# Altium PCB Stepper PCB Correctionsv1.PcbDoc
Units mm, origin at the board's own origin, x right, y up, seen from the top; angles counter-clockwise.
Board outline 195.58 x 105.66 mm, 2 copper layers (Top Layer, Bottom Layer); 57 components, 50 nets, 280 pads, 5 vias.
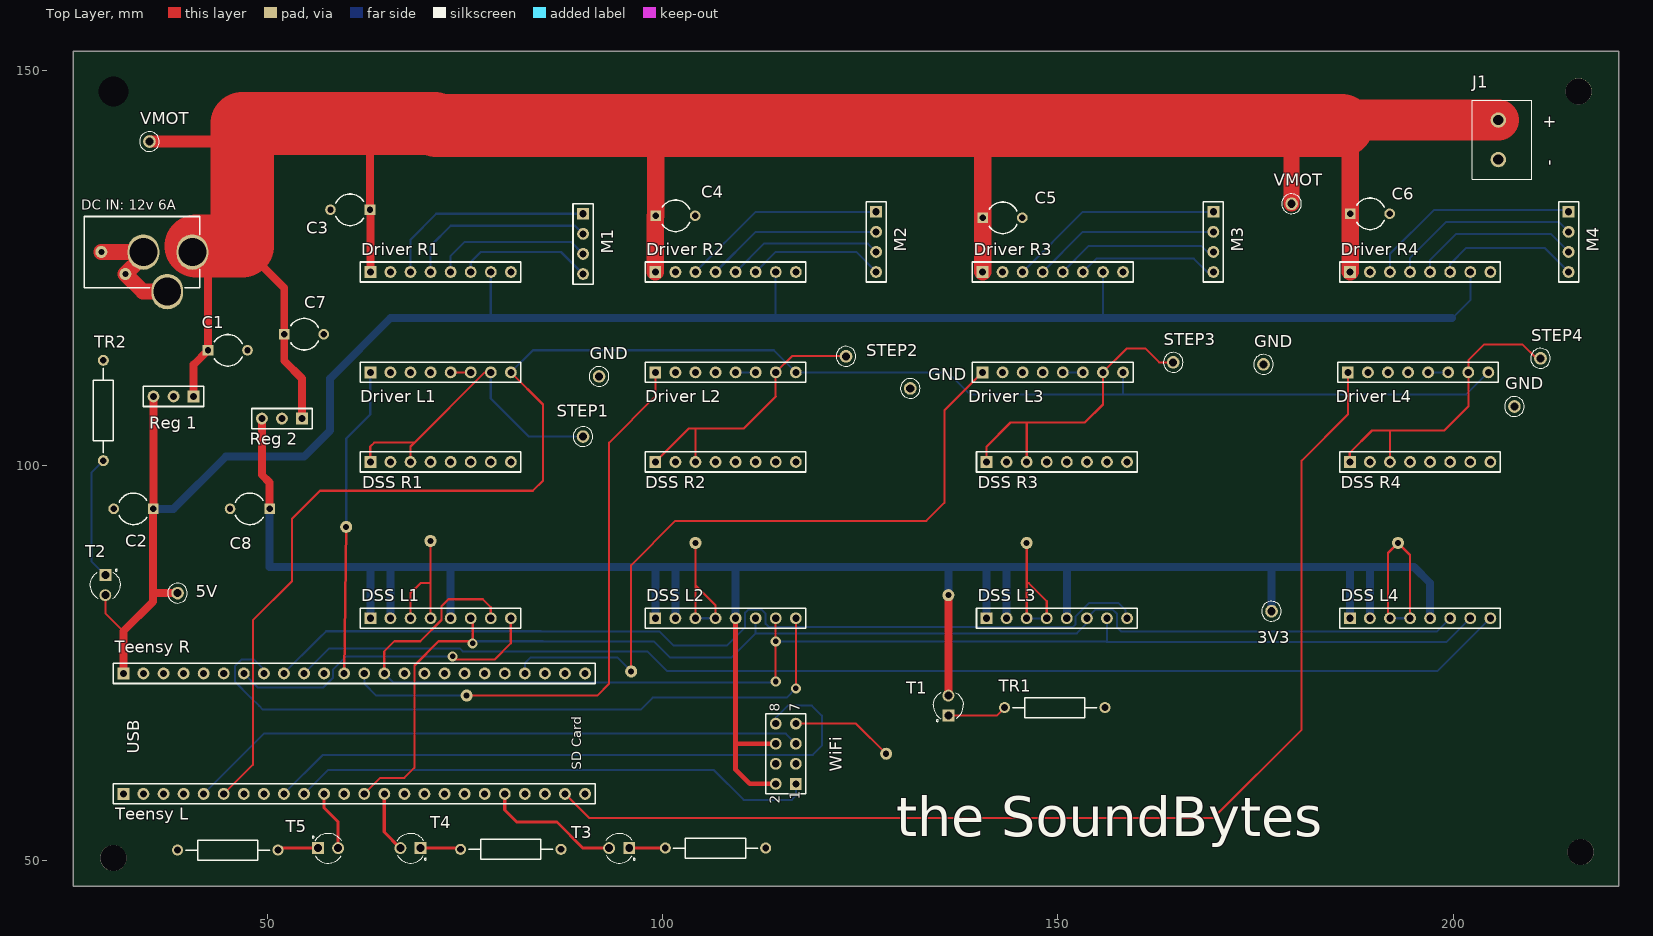
[diagram p0: Top Layer view]
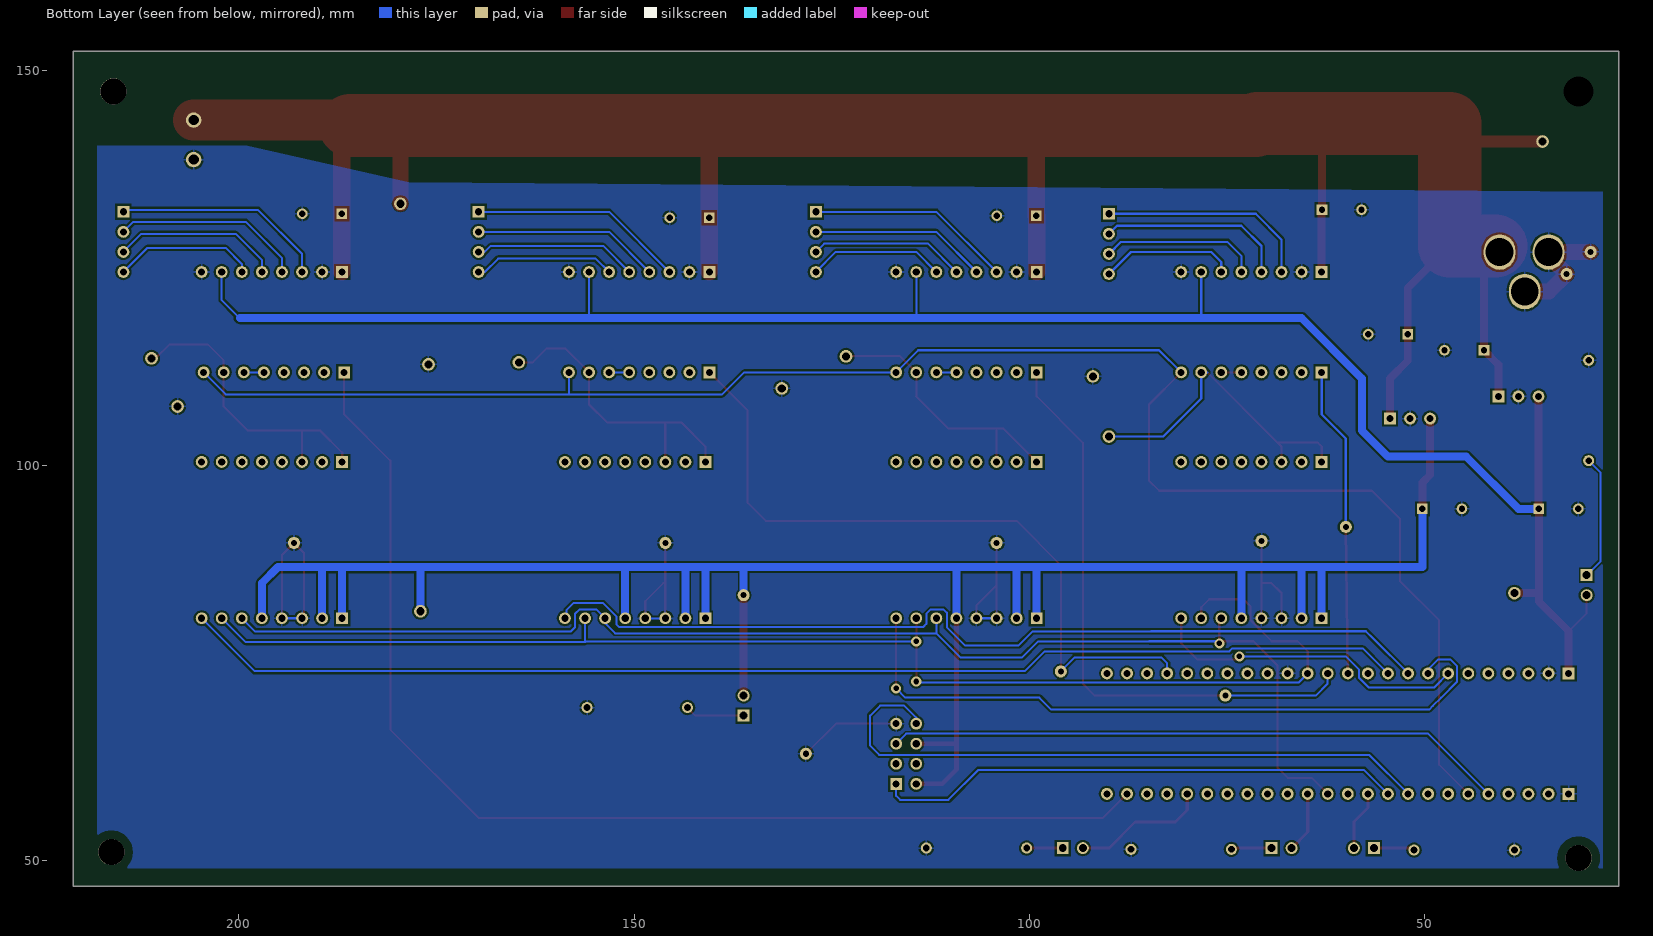
[diagram p1: Bottom Layer view, seen from below]

## Layer stack, top to bottom
Top Solder: solder mask 0.0102, Solder Resist, Dk 3.5
Top Layer: signal copper 0.0356
Dielectric 1: dielectric 0.32, FR-4, Dk 4.8
Bottom Layer: signal copper 0.0356
Bottom Solder: solder mask 0.0102, Solder Resist, Dk 3.5

## Board outline
25.4,46.736 220.98,46.736 220.98,152.4 25.4,152.4

## Design rules (kind name [scope] priority, off if disabled: settings)
Clearance [All] p1: gap=0.254
PolygonConnect [All] p1: connectstyle=Relief reliefconductorwidth=0.254 reliefentries=4 polygonreliefangle="90 Angle" airgapwidth=0.254
RoutingVias [All] p1: holewidth=0.711 width=1.27 viastyle="Through Hole" minholewidth=0.711 minwidth=1.27 maxholewidth=0.711 maxwidth=1.27
SolderMaskExpansion [All] p1: expansion=0.102
Width Width_1 [All] p1: maxlimit=1 minlimit=0.28 preferedwidth=1 minimp=50.000000 maximp=50.000000 favimp=50.000000
Width [InNet('VMOT')] p2: maxlimit=8.2 minlimit=7.6 preferedwidth=8 minimp=50.000000 maximp=50.000000 favimp=50.000000
30 further rules are at their usual default settings.

## Classes and differential pairs
component class "Stepper Teensy Breakout": 3V3 5V C1 C2 C3 C4 C5 C6 C7 C8 "DC IN: 12v 6A" "Driver L1" "Driver L2" "Driver L3" "Driver L4" "Driver R1" "Driver R2" "Driver R3" "Driver R4" "DSS L1" "DSS L2" "DSS L3" "DSS L4" "DSS R1" "DSS R2" "DSS R3" "DSS R4" GND J1 M1 M2 M3 M4 "Reg 1" "Reg 2" STEP1 STEP2 STEP3 STEP4 T1 T2 T3 T4 T5 "Teensy L" "Teensy R" TR1 TR2 VMOT WiFi

## Components (designator, comment, footprint, x,y, rotation, side; value= is the part's Value field where it differs from the comment)
3V3 "" TPCW51D250H460P 177.038,81.534 r0 top (schematic designator TP11)
5V "" TPCW51D250H460P 38.608,83.82 r90 top (schematic designator TP10)
C1 "Cap2" CAPR5-4X5 44.958,114.554 r0 top
C2 "Cap2" CAPR5-4X5 33.02,94.488 r180 top
C3 "" CAPR5-4X5 60.452,132.334 r180 top
C4 "Cap2" CAPR5-4X5 101.6,131.572 r0 top
C5 "Cap2" CAPR5-4X5 143.002,131.318 r0 top
C6 "Cap2" CAPR5-4X5 189.484,131.826 r0 top
C7 "Cap2" CAPR5-4X5 54.61,116.586 r0 top
C8 "Cap2" CAPR5-4X5 47.752,94.488 r180 top
"DC IN: 12v 6A" "PWR2.5" KLD-0202 26.79,126.984 r0 top (schematic designator "PWR Jack")
"Driver L1" "Header 8" HDR1X8 63,111.76 r0 top
"Driver L2" "Header 8" HDR1X8 99.06,111.76 r0 top locked
"Driver L3" "Header 8" HDR1X8 140.462,111.76 r0 top locked
"Driver L4" "Header 8" HDR1X8 186.69,111.76 r0 top locked
"Driver R1" "Header 8" HDR1X8 63,124.46 r0 top
"Driver R2" "Header 8" HDR1X8 99.06,124.46 r0 top locked
"Driver R3" "Header 8" HDR1X8 140.462,124.46 r0 top locked
"Driver R4" "Header 8" HDR1X8 186.944,124.46 r0 top locked
"DSS L1" "Header 8" HDR1X8 63,80.645 r0 top locked
"DSS L2" "Header 8" HDR1X8 99.06,80.645 r0 top
"DSS L3" "Header 8" HDR1X8 140.97,80.645 r0 top locked
"DSS L4" "Header 8" HDR1X8 186.944,80.645 r0 top
"DSS R1" "Header 8" HDR1X8 63,100.42 r0 top locked
"DSS R2" "Header 8" HDR1X8 99.06,100.42 r0 top
"DSS R3" "Header 8" HDR1X8 140.97,100.42 r0 top
"DSS R4" "Header 8" HDR1X8 186.944,100.42 r0 top
GND "" TPCW51D250H460P 207.772,107.442 r0 top (schematic designator TP8)
GND "" TPCW51D250H460P 91.948,111.252 r0 top (schematic designator TP7)
GND "" TPCW51D250H460P 176.022,112.776 r0 top (schematic designator TP6)
GND "" TPCW51D250H460P 131.318,109.728 r0 top (schematic designator TP5)
J1 "" 691102710002 205.74,141.184 r270 top
M1 "Header 4" HDR1X4 89.916,131.826 r270 top (schematic designator "Motor 1")
M2 "Header 4" HDR1X4 127,132.08 r270 top (schematic designator "Motor 2")
M3 "Header 4" HDR1X4 169.672,132.08 r270 top (schematic designator "Motor 3")
M4 "Header 4" HDR1X4 214.63,132.08 r270 top (schematic designator "Motor 4")
"Reg 1" "Header 3" HDR1X3 40.64,108.712 r180 top (schematic designator "Sw Reg")
"Reg 2" "Header 2" HDR1X3 54.356,105.918 r180 top (schematic designator "Sw Reg1")
STEP1 "" TPCW51D250H460P 89.916,103.632 r0 top (schematic designator TP1)
STEP2 "" TPCW51D250H460P 123.19,113.792 r0 top (schematic designator TP2)
STEP3 "" TPCW51D250H460P 164.592,113.03 r0 top (schematic designator TP3)
STEP4 "" TPCW51D250H460P 211.074,113.538 r0 top (schematic designator TP4)
T1 "LTL-1CHYE" LED_LTL-1CHYE_LTL-1CHYE(Primary) 136.144,69.596 r90 top
T2 "LTL-1CHYE" LED_LTL-1CHYE_LTL-1CHYE(Primary) 29.464,84.836 r270 top
T3 "LTL-1CHYE" LED_LTL-1CHYE_LTL-1CHYE(Primary) 94.488,51.562 r180 top
T4 "LTL-1CHYE" LED_LTL-1CHYE_LTL-1CHYE(Primary) 68.072,51.562 r180 top
T5 "LTL-1CHYE" LED_LTL-1CHYE_LTL-1CHYE(Primary) 57.658,51.562 r0 top
"Teensy L" "Header 24" HDR1X24 31.75,58.42 r0 top locked
"Teensy R" "Header 24" HDR1X24 31.75,73.66 r0 top locked
TR1 "" AXIAL-0.5 149.606,69.342 r180 top
TR2 "" AXIAL-0.5 29.21,106.934 r270 top
TR3 "" AXIAL-0.5 106.68,51.562 r180 top
TR4 "" AXIAL-0.5 80.772,51.402 r180 top
TR5 "" AXIAL-0.5 44.958,51.308 r180 top
VMOT "" TPCW51D250H460P 179.578,133.096 r180 top (schematic designator TP12)
VMOT "" TPCW51D250H460P 35.052,140.97 r0 top (schematic designator TP9)
WiFi "Header 4X2" HDR2X4 116.84,59.69 r90 top (schematic designator ESP)

## Footprints (in the part's own frame and the unit in brackets; to place one, negate y for a bottom-side part, rotate by r counter-clockwise, add the part's x,y. Pads: shape width x height; smd on the part's side, far side on the other; paste and mask are expansions set on the pad)
691102710002 [mm]
  round 1.95 hole 1.3: 1(-2.5,0) 2(2.5,0)
  silkscreen extent -5,-3.3 5,4.2
AXIAL-0.5 [mm] "Axial Device, Thru-Hole; 2 Leads; 0.5 in Pin Spacing"
  round 1.4 hole 0.85: 1(-6.35,0) 2(6.35,0)
  silkscreen extent -5.33,-1.27 5.33,1.27
CAPR5-4X5 [mm] "Capacitor; 2 Leads"
  rect 1.35x1.35 hole 0.8: 1(-2.5,0)
  round 1.35 hole 0.8: 2(2.5,0)
  silkscreen extent -1.69,-2 1.82,2
HDR1X3 [mm] "Connector; Header; 3 Position"
  rect 1.5x1.5 hole 0.9: 1(0,0)
  round 1.5 hole 0.9: 2(2.54,0) 3(5.08,0)
  silkscreen extent -1.27,-1.27 6.35,1.27
HDR1X4 [mm] "Connector; Header; 4 Position"
  rect 1.5x1.5 hole 0.9: 1(0,0)
  round 1.5 hole 0.9: 2(2.54,0) 3(5.08,0) 4(7.62,0)
  silkscreen extent -1.27,-1.27 8.89,1.27
HDR1X8 [mm] "Connector; Header; 8 Position"
  rect 1.5x1.5 hole 0.9: 1(0,0)
  round 1.5 hole 0.9: 2(2.54,0) 3(5.08,0) 4(7.62,0) 5(10.16,0) 6(12.7,0) 7(15.24,0) 8(17.78,0)
  silkscreen extent -1.27,-1.27 19.05,1.27
HDR1X24 [mm] "Connector; Header; 24 Position"
  rect 1.5x1.5 hole 0.9: 1(0,0)
  round 1.5 hole 0.9: 2(2.54,0) 3(5.08,0) 4(7.62,0) 5(10.16,0) 6(12.7,0) 7(15.24,0) 8(17.78,0) 9(20.32,0) 10(22.86,0) 11(25.4,0) 12(27.94,0) 13(30.48,0) 14(33.02,0) 15(35.56,0) 16(38.1,0) 17(40.64,0) 18(43.18,0) 19(45.72,0) 20(48.26,0) 21(50.8,0) 22(53.34,0) 23(55.88,0) 24(58.42,0)
  silkscreen extent -1.27,-1.27 59.69,1.27
HDR2X4 [mm] "Connector; Header; 4x2 Position"
  rect 1.5x1.5 hole 0.9: 1(0,0)
  round 1.5 hole 0.9: 2(0,2.54) 3(2.54,0) 4(2.54,2.54) 5(5.08,0) 6(5.08,2.54) 7(7.62,0) 8(7.62,2.54)
  silkscreen extent -1.27,-1.27 8.89,3.81
KLD-0202 [mm] "DC Power Jack, 2.5mm, KLD Series, PCB Mount"
  oval 4x4.5 hole 3.5: 1(13.7,0) 2(7.5,0) 3(10.5,-5)
  round 1.5 hole 0.2: 1A(13.7,-1.25) 1B(13.7,1.25) 2A(7.5,-1) 2B(7.5,1) 3A(9.5,-5) 3B(11.5,-5)
  silkscreen extent 0,-4.5 14.6,4.5
LED_LTL-1CHYE_LTL-1CHYE(Primary) [mm]
  round 1.508 hole 1: A(1.27,0)
  rect 1.508x1.508 hole 1: C(-1.27,0)
  silkscreen extent -2.03,-1.9 1.66,1.9
TPCW51D250H460P [mm]
  round 1.6 hole 1.02: 1(0,0)
  silkscreen extent -1.25,-1.25 1.25,1.25

## Part data
3V3 5V GND GND GND GND STEP1 STEP2 STEP3 STEP4 VMOT VMOT: library part 5003, "Test Point; Orange; Thru-Hole; Snap-Fit; SilverPlate; 0.040 in. Dia.; 0.300 In."
C1 C2 C4 C5 C6 C7 C8: "Capacitor"
C3: library part Cap2, "Capacitor"
"DC IN: 12v 6A": "Low Voltage Power Supply Connector"
"Driver L1" "Driver L2" "Driver L3" "Driver L4" "Driver R1" "Driver R2" "Driver R3" "Driver R4" "DSS L1" "DSS L2" "DSS L3" "DSS L4" "DSS R1" "DSS R2" "DSS R3" "DSS R4": "Header, 8-Pin"
J1: library part 691102710002, "102 Series 5mm Pitch Straight, PCB Terminal Block, Through Hole, 2 Way"
M1 M2 M3 M4: "Header, 4-Pin"
"Reg 1": "Header, 3-Pin"
"Reg 2": library part "Header 3", "Header, 3-Pin"
T1 T2 T3 T4 T5: "Yellow 3.1 mm 45° Tinted Clear 40 mcd 2.1 V LED Through Hole"
"Teensy L" "Teensy R": "Header, 24-Pin"
TR1 TR2 TR3 TR4 TR5: library part "Res Semi", "Semiconductor Resistor"
WiFi: "Header, 4-Pin, Dual row"

## Free pads (board coordinates)
  round 3.3 hole 3.8: 0(30.48,147.32)
  round 1.524 hole 0.762: 2(28.956,127) 3(32.004,124.206) 9(75.184,70.866) 10(96.012,73.914) 11(136.144,83.566) 15(70.612,90.424) 16(104.14,90.17) 17(146.05,90.17) 18(193.04,90.17) 19(128.27,63.5) 20(59.944,92.202)
  round 3.3 hole 3.3: 6(215.9,147.32) 7(216.154,51.054) 8(30.48,50.292)

## Via types
v1: diameter 1.27, hole 0.711, Top Layer to Bottom Layer, 5 vias

## Nets (pads, with @x,y where several pads share a name; then routed paths per layer and width w, separated by ;. In a path a pad name is that pad's centre, name@x,y a point inside that pad or via, vN(x,y) a via of type N, cw(c..) or ccw(c..) an arc to the next point about the centre after c; other vN are vias at no path point)
1A_A: "Driver R1.5" M1.3 | length 20.2
  Bottom Layer w0.28: 73.16,124.46 73.16,126.5 74.93,128.27 88.392,128.27 M1.3
1A_B: "Driver R2.5" M2.3 | length 19.7
  Bottom Layer w0.254: 109.22,124.46 112.801,128.041 125.959,128.041 M2.3
1A_C: "Driver R3.5" M3.3 | length 20.7
  Bottom Layer w0.254: 150.622,124.46 153.924,127.762 168.148,127.762 168.91,127 M3.3
1A_D: "Driver R4.5" M4.3 | length 21.4
  Bottom Layer w0.254: 197.104,124.46 197.104,125.984 200.406,129.286 212.344,129.286 M4.3
1B_A: "Driver R1.6" M1.4 | length 17.2
  Bottom Layer w0.28: 75.7,124.46 75.7,125.738 76.962,127 87.122,127 M1.4
1B_B: "Driver R2.6" M2.4 | length 17.3
  Bottom Layer w0.254: 111.76,124.46 114.3,127 124.46,127 M2.4
1B_C: "Driver R3.6" M3.4 | length 17.9
  Bottom Layer w0.254: 153.162,124.46 154.864,126.162 167.208,126.162 168.91,124.46 M3.4
1B_D: "Driver R4.6" M4.4 | length 18.1
  Bottom Layer w0.254: 199.644,124.46 199.644,125.476 201.676,127.508 211.582,127.508 M4.4
2A_A: "Driver R1.4" M1.2 | length 24.1
  Bottom Layer w0.28: 70.62,124.46 70.62,127.745 73.177,130.302 88.9,130.302 M1.2
2A_B: "Driver R2.4" M2.2 | length 22.4
  Bottom Layer w0.254: 106.68,124.46 111.76,129.54 M2.2
2A_C: "Driver R3.4" M3.2 | length 23.7
  Bottom Layer w0.254: 148.082,124.46 153.162,129.54 M3.2
2A_D: "Driver R4.4" M4.2 | length 24.3
  Bottom Layer w0.254: 194.564,124.46 194.564,126.238 199.136,130.81 213.36,130.81 M4.2
2B_A: "Driver R1.3" M1.1 | length 27.3
  Bottom Layer w0.28: 68.08,124.46 68.08,128.557 71.349,131.826 M1.1
2B_B: "Driver R2.3" M2.1 | length 26
  Bottom Layer w0.254: 104.14,124.46 111.76,132.08 M2.1
2B_C: "Driver R3.3" M3.1 | length 27.3
  Bottom Layer w0.254: 145.542,124.46 153.162,132.08 M3.1
2B_D: "Driver R4.3" M4.1 | length 27.3
  Bottom Layer w0.254: 192.024,124.46 192.024,126.746 197.612,132.334 214.376,132.334 M4.1
3V3: 3V3.1 "DSS L1.1" "DSS L1.2" "DSS L1.5" "DSS L2.1" "DSS L2.2" "DSS L2.5" "DSS L3.1" "DSS L3.2" "DSS L3.5" "DSS L4.1" "DSS L4.2" "DSS L4.5" "Reg 2.3" C8.1 pad.11 T1.A WiFi.2 WiFi.6 | length 294.5
  Top Layer w0.6: 109.22,80.645 109.22,64.77 ; WiFi.2 110.998,59.69 109.22,61.468 109.22,64.77 ; WiFi.6 109.22,64.77
  Top Layer w1: 49.276,105.918 49.276,98.806 50.252,97.83 C8.1 ; T1.A pad.11
  Bottom Layer w1: C8.1 50.252,87.122 63,87.122 ; 63,80.645 63,87.122 ; 65.54,80.645 65.54,87.114 65.532,87.122 ; 73.16,80.645 73.16,87.114 73.152,87.122 ; 99.06,80.645 99.06,87.122 ; 101.6,80.645 101.6,87.122 ; 109.22,80.645 109.22,87.122 ; pad.11 136.144,87.122 ; 140.97,80.645 140.97,87.122 ; 143.51,80.645 143.51,87.122 ; 151.13,80.645 151.13,87.122 ; 3V3.1 177.038,87.122 ; 186.944,80.645 186.944,87.122 ; 189.484,80.645 189.484,87.122 ; 197.104,80.645 197.104,85.09 195.072,87.122 189.484,87.122 ; 63,87.122 65.532,87.122 ; 65.532,87.122 73.152,87.122 ; 73.152,87.122 99.06,87.122 ; 99.06,87.122 101.6,87.122 ; 101.6,87.122 109.22,87.122 ; 109.22,87.122 136.144,87.122 ; 136.144,87.122 140.97,87.122 ; 140.97,87.122 143.51,87.122 ; 143.51,87.122 151.13,87.122 ; 151.13,87.122 177.038,87.122 ; 177.038,87.122 186.944,87.122 ; 186.944,87.122 189.484,87.122
5V: 5V.1 "Driver R1.7" "Driver R2.7" "Driver R3.7" "Driver R4.7" "Reg 1.3" "Teensy R.1" C2.1 T2.A | length 247.8
  Top Layer w0.254: T2.A 29.464,81.28 31.75,78.994
  Top Layer w0.28: C2.1 C2.1@35.56,94.528
  Top Layer w1: 31.75,73.66 31.75,78.994 35.52,82.764 35.52,83.82 ; C2.1 35.52,83.82 ; C2.1@35.56,94.528 35.56,108.712 ; 5V.1 35.52,83.82
  Bottom Layer w0.254: 114.3,118.618 114.3,124.46 ; 155.702,118.618 155.702,124.46 ; 199.898,118.618 202.184,120.904 202.184,124.46
  Bottom Layer w0.28: 78.232,118.618 78.24,118.626 78.24,124.46
  Bottom Layer w1: C2.1 38.1,94.488 44.704,101.092 54.61,101.092 57.912,104.394 57.912,110.998 65.532,118.618 78.232,118.618 114.3,118.618 155.702,118.618 199.898,118.618
24: "Teensy L.14" T4.A | length 7.7
  Top Layer w0.4: 64.77,58.42 64.77,53.594 T4.A
28: "Teensy L.20" T3.A | length 17.2
  Top Layer w0.4: 80.01,58.42 80.01,56.388 81.534,54.864 86.614,54.864 89.916,51.562 T3.A
CS1: "DSS L1.8" "Teensy R.7" | length 40.9
  Top Layer w0.28: v1(73.406,75.819) 73.787,75.438 78.74,75.438 80.78,77.478 80.78,80.645
  Bottom Layer w0.254: 46.99,73.66 48.768,71.882 57.023,71.882 58.293,73.152 58.293,74.168 59.944,75.819 v1(73.406,75.819)
CS2: "DSS L2.8" "Teensy R.8" | length 89.4
  Top Layer w0.254: v1(116.84,71.78) 116.84,80.645
  Bottom Layer w0.254: 49.53,73.66 49.53,74.168 48.26,75.438 46.736,75.438 45.847,74.549 45.847,72.644 47.879,70.612 48.938,69.553 49.403,69.088 97.199,69.088 98.723,70.612 115.672,70.612 v1(116.84,71.78)
CS3: "DSS L3.8" "Teensy R.9" | length 117.4
  Bottom Layer w0.254: 52.07,73.66 56.49,78.08 ; 84.582,78.994 99.568,78.994 101.346,77.216 108.153,77.216 110.439,79.502 110.439,81.356 110.859,81.776 112.458,81.776 113.03,81.204 113.03,79.934 113.45,79.514 151.892,79.514 152.261,79.883 152.261,80.887 153.924,82.55 157.702,82.55 158.535,81.717 158.535,80.86 158.75,80.645
  Bottom Layer w0.28: 56.49,78.08 57.404,78.994 84.582,78.994
CS4: "DSS L4.8" "Teensy R.10" | length 155.4
  Bottom Layer w0.254: 54.61,73.66 57.785,76.835 74.295,76.835 74.676,76.454 98.044,76.454 100.559,73.939 198.018,73.939 204.724,80.645
DIR: "Driver L1.8" "Driver L2.8" "Driver L3.8" "Driver L4.8" "Teensy L.6" | length 218.6
  Top Layer w0.254: 44.45,58.42 48.133,62.103 48.133,80.391 53.086,85.344
  Top Layer w0.28: 53.086,85.344 53.086,93.218 56.642,96.774 83.566,96.774 84.836,98.044 84.836,107.704 80.78,111.76
  Bottom Layer w0.254: 114.046,114.554 116.84,111.76 136.068,111.76 138.862,108.966 158.242,108.966 ; 158.242,111.76 158.242,108.966 ; 204.47,111.76 201.676,108.966 158.242,108.966
  Bottom Layer w0.28: 80.78,111.76 83.574,114.554 114.046,114.554
ENA1: "Driver L1.1" "Teensy R.12" pad.20 | length 39.4
  Top Layer w0.28: 59.69,73.66 pad.20
  Bottom Layer w0.28: pad.20 59.944,103.378 63,106.434 63,111.76
ENA2: "Driver L2.1" "Teensy R.13" pad.9 | length 75.3
  Top Layer w0.254: pad.9 91.694,70.866 93.218,72.39 93.218,102.87 99.06,108.712 99.06,111.76
  Bottom Layer w0.254: 62.23,73.66 62.23,72.39 63.754,70.866 pad.9
ENA3: "Driver L3.1" "Teensy R.21" pad.10 | length 90.6
  Top Layer w0.254: pad.10 96.012,87.376 101.6,92.964 133.35,92.964 135.636,95.25 135.636,106.934 140.462,111.76
  Bottom Layer w0.254: 82.55,73.66 82.55,74.93 83.312,75.692 94.234,75.692 pad.10
ENA4: "Driver L4.1" "Teensy L.23" | length 146.7
  Top Layer w0.254: 87.63,58.42 90.678,55.372 169.672,55.372 180.848,66.548 180.848,100.584 186.69,106.426 186.69,111.76
GND: "DC IN: 12v 6A.2" "DC IN: 12v 6A.2A" "DC IN: 12v 6A.2B" "DC IN: 12v 6A.3" "DC IN: 12v 6A.3A" "DC IN: 12v 6A.3B" "Driver R1.2" "Driver R1.8" "Driver R2.2" "Driver R2.8" "Driver R3.2" "Driver R3.8" "Driver R4.2" "Driver R4.8" "DSS L1.3" "DSS L1.4" "DSS L2.3" "DSS L2.4" "DSS L3.3" "DSS L3.4" "DSS L4.3" "DSS L4.4" "Reg 1.2" "Reg 2.2" "Teensy L.1" "Teensy R.2" "Teensy R.15" C1.2 C2.2 C3.2 C4.2 C5.2 C6.2 C7.2 C8.2 GND.1 J1.2 pad.2 pad.3 pad.15 pad.16 pad.17 pad.18 pad.19 TR1.1 TR2.1 TR3.1 TR4.1 TR5.2 WiFi.7 | length 102.9
  Top Layer w0.28: 68.08,80.645 68.08,83.828 69.342,85.09 70.612,85.09 ; pad.15 70.612,85.09 ; 70.62,80.645 70.612,80.653 70.612,85.09 ; 104.14,80.518 104.14,80.645 104.14,84.836 ; pad.16 104.14,84.836 ; 106.68,80.645 106.68,82.296 104.14,84.836 ; WiFi.7 124.46,67.31 pad.19 ; 146.05,80.645 146.05,85.09 ; pad.17 146.05,85.09 ; 148.59,80.645 148.59,82.804 146.304,85.09 146.05,85.09 ; 192.024,80.645 191.77,80.899 191.77,88.9 pad.18 194.564,88.646 194.564,80.645
  Top Layer w2: pad.2 33.274,127 33.29,126.984 ; 34.29,125.984 34.036,126.238 ; 34.29,127.984 34.29,126.984 34.29,126.492 34.036,126.238 ; 37.29,121.984 36.29,121.984 34.226,121.984 pad.3 34.036,126.238
  Bottom Layer w0.254: 146.05,80.645 148.59,80.645 ; 189.484,124.46 189.484,124.714
  Bottom Layer w0.28: 104.14,80.645 106.68,80.645 ; 192.024,80.645 194.564,80.645
NetT1_C: T1.C TR1.2 | length 7.5
  Top Layer w0.254: T1.C 142.24,68.326 TR1.2
NetT2_C: T2.C TR2.2 | length 15.8
  Bottom Layer w0.254: TR2.2 27.686,99.06 27.686,87.884 T2.C
NetT3_C: T3.C TR3.2 | length 4.6
  Top Layer w0.4: T3.C TR3.2
NetT4_C: T4.C TR4.2 | length 5.1
  Top Layer w0.4: T4.C 74.262,51.562 TR4.2
NetT5_A: "Teensy L.11" T5.A | length 7.6
  Top Layer w0.4: 57.15,58.42 57.15,56.642 58.928,54.864 T5.A
NetT5_C: T5.C TR5.1 | length 5.2
  Top Layer w0.4: TR5.1 51.562,51.562 T5.C
PIN3: "Teensy L.5" WiFi.5 | length 78.6
  Bottom Layer w0.254: 41.91,58.42 49.53,66.04 115.57,66.04 WiFi.5
PIN7: "Teensy L.9" WiFi.8 | length 82.2
  Bottom Layer w0.254: 52.07,58.42 57.011,63.361 118.987,63.361 120.142,64.516 120.142,68.326 118.872,69.596 115.824,69.596 114.3,68.072 WiFi.8
PIN8: "Teensy L.10" WiFi.1 | length 66.8
  Bottom Layer w0.254: 54.61,58.42 57.658,61.468 106.426,61.468 110.236,57.658 116.332,57.658 116.84,58.166 WiFi.1
RESET1: "Driver L1.5" "Driver L1.6" | length 2.5
  Top Layer w0.28: 73.16,111.76 75.7,111.76
RESET2: "Driver L2.5" "Driver L2.6" | length 2.5
  Bottom Layer w0.254: 109.22,111.76 111.76,111.76
RESET3: "Driver L3.5" "Driver L3.6" | length 2.5
  Bottom Layer w0.254: 150.622,111.76 153.162,111.76
RESET4: "Driver L4.5" "Driver L4.6" | length 2.5
  Bottom Layer w0.254: 196.85,111.76 199.39,111.76
SCK: "DSS L1.7" "DSS L2.7" "DSS L3.7" "DSS L4.7" "Teensy R.14" | length 172.4
  Top Layer w0.254: v1(114.3,72.644) v1(114.3,77.724) 114.3,80.645
  Top Layer w0.28: 64.77,73.66 64.77,76.454 66.04,77.724 69.317,77.724 72.016,80.423 72.016,82.176 72.898,83.058 77.216,83.058 78.24,82.034 78.24,80.645
  Bottom Layer w0.254: 64.77,73.66 65.913,72.517 v1@114.173,72.517 ; v1@114.046,72.39 v1@114.173,72.517 ; v1(114.3,72.644) v1@114.173,72.517 ; v1(114.3,77.724) 156.108,77.724 156.21,77.622 ; 156.21,80.645 156.21,77.622 ; 202.184,80.645 199.161,77.622 156.21,77.622
  Bottom Layer w0.28: 78.24,80.645 78.359,80.645
SDA: "DSS L1.6" "DSS L2.6" "DSS L3.6" "DSS L4.6" "Teensy L.13" | length 165.1
  Top Layer w0.254: 62.23,58.42 64.262,60.452 67.31,60.452 68.58,61.722 68.58,74.676
  Top Layer w0.28: 68.58,74.676 71.628,77.724 75.438,77.724 75.692,77.47 v1(75.946,77.47) 75.946,80.383 75.692,80.637 75.7,80.645
  Bottom Layer w0.254: 84.836,77.724 98.869,77.724 100.901,75.692 108.712,75.692 111.76,78.74 ; 111.76,80.645 111.76,78.74 ; 199.644,80.645 197.993,78.994 157.988,78.994 157.48,79.502 157.48,81.204 156.908,81.776 154.801,81.776 153.67,80.645 153.67,80.01 152.4,78.74 111.76,78.74
  Bottom Layer w0.28: v1(75.946,77.47) 75.946,77.724 84.836,77.724
STEP1: "Driver L1.7" "DSS R1.1" "DSS R1.3" STEP1.1 | length 40.7
  Top Layer w0.28: 63,100.42 63,102.37 63.5,102.87 68.58,102.87 ; 68.08,100.42 68.08,102.37 68.58,102.87 ; 77.47,111.76 68.58,102.87
  Bottom Layer w0.28: 77.47,111.76 78.24,111.76 78.24,108.45 83.058,103.632 STEP1.1
STEP2: "Driver L2.7" "DSS R2.1" "DSS R2.3" STEP2.1 | length 35.2
  Top Layer w0.254: 114.3,108.712 114.3,111.76 116.357,113.817 STEP2.1@122.682,113.817
  Top Layer w0.28: 99.06,100.42 103.288,104.648 104.14,104.648 ; 104.14,100.42 104.14,104.648 ; 114.3,108.712 110.236,104.648 104.14,104.648
STEP3: "Driver L3.7" "DSS R3.1" "DSS R3.3" STEP3.1 | length 38.8
  Top Layer w0.254: 155.702,107.696 155.702,111.76 158.75,114.808 161.036,114.808 162.814,113.03 STEP3.1
  Top Layer w0.28: 140.97,100.42 140.97,102.362 144.018,105.41 146.05,105.41 ; 146.05,100.42 146.05,105.41 ; 155.702,107.696 153.416,105.41 146.05,105.41
STEP4: "Driver L4.7" "DSS R4.1" "DSS R4.3" STEP4.1 | length 39.1
  Top Layer w0.254: 201.93,107.442 201.93,111.76 201.93,113.284 203.962,115.316 208.788,115.316 210.566,113.538 STEP4.1
  Top Layer w0.28: 186.944,100.42 186.944,101.6 189.738,104.394 192.024,104.394 ; 192.024,100.42 192.024,104.394 ; 201.93,107.442 198.882,104.394 192.024,104.394
VMOT: "DC IN: 12v 6A.1" "DC IN: 12v 6A.1A" "DC IN: 12v 6A.1B" "Driver R1.1" "Driver R2.1" "Driver R3.1" "Driver R4.1" "Reg 1.1" "Reg 2.1" C1.1 C3.1 C4.1 C5.1 C6.1 C7.1 J1.1 VMOT.1 | length 321.3
  Top Layer w0.254: 71.108,143.268 71.374,143.002 ; C4.1@99.06,131.532 C4.1 ; 99.06,143.002 99.1,142.962 ; 140.462,124.46 140.502,124.5 ; 140.462,143.002 140.502,142.962 ; 186.944,124.46 186.984,124.5
  Top Layer w0.28: 40.962,127.762 42.458,126.266 ; 185.928,143.002 186.61,143.684
  Top Layer w1: 40.64,108.712 40.64,112.736 C1.1 42.458,126.266 ; 46.793,127.762 52.11,122.445 C7.1 52.11,113.244 54.356,110.998 54.356,105.918 ; 63,124.46 63,132.286 C3.1 62.952,142.974 63.246,143.268
  Top Layer w1.5: VMOT.1@35.052,140.97 46.736,140.97
  Top Layer w2: VMOT.1@179.578,133.096 179.578,143.002
  Top Layer w2.2: 99.06,124.46 C4.1@99.06,131.532 ; C4.1 99.1,142.962 ; 140.502,124.5 C5.1 140.502,142.962 ; 186.984,124.5 C6.1 186.984,141.946
  Top Layer w5.2: 186.61,143.684 J1.1
  Top Layer w8: 40.962,127.762 46.793,127.762 46.793,143.268 63.246,143.268 71.108,143.268 ; 71.374,143.002 99.06,143.002 140.462,143.002 179.578,143.002 185.928,143.002
pads on no net: "Driver L1.2" "Driver L1.3" "Driver L1.4" "Driver L2.2" "Driver L2.3" "Driver L2.4" "Driver L3.2" "Driver L3.3" "Driver L3.4" "Driver L4.2" "Driver L4.3" "Driver L4.4" "DSS R1.2" "DSS R1.4" "DSS R1.5" "DSS R1.6" "DSS R1.7" "DSS R1.8" "DSS R2.2" "DSS R2.4" "DSS R2.5" "DSS R2.6" "DSS R2.7" "DSS R2.8" "DSS R3.2" "DSS R3.4" "DSS R3.5" "DSS R3.6" "DSS R3.7" "DSS R3.8" "DSS R4.2" "DSS R4.4" "DSS R4.5" "DSS R4.6" "DSS R4.7" "DSS R4.8" "Teensy L.2" "Teensy L.3" "Teensy L.4" "Teensy L.7" "Teensy L.8" "Teensy L.12" "Teensy L.15" "Teensy L.16" "Teensy L.17" "Teensy L.18" "Teensy L.19" "Teensy L.21" "Teensy L.22" "Teensy L.24" "Teensy R.3" "Teensy R.4" "Teensy R.5" "Teensy R.6" "Teensy R.11" "Teensy R.16" "Teensy R.17" "Teensy R.18" "Teensy R.19" "Teensy R.20" "Teensy R.22" "Teensy R.23" "Teensy R.24" WiFi.3 WiFi.4

## Polygon pours and split planes (outlines as drawn)
GND on Bottom Layer "GND" (solid, pour order 0): 27.432,134.633 27.432,49.022 217.932,49.022 217.932,140.462 198.987,140.462 178.506,135.821

## Silkscreen, mask and mechanical layers (free items; w line width, h text height)
Top Overlay:
  text "+" at 211.328,142.748 h1.52
  text "-" at 212.852,137.922 h1.52 r90
  text "USB" at 33.782,63.5 h1.52 r90
  text "SD Card" at 89.662,61.468 h1.2 r90
  text "the SoundBytes" at 129.54,53.086 h5

## Text inside footprints (layer, text, board x,y; h text height)
"DC IN: 12v 6A": Mechanical 1 "Mech 2 - Clearance, move to internal plane if present" at 27.076,132.05 h0.3; Mechanical 1 "Mech 1 - Slot cut-out" at 27.076,132.55 h0.3; Mechanical 1 "Assign keep-out area to slot" at 27.076,133.55 h0.3; Mechanical 1 "Alert PCB fab to slot details" at 27.076,133.05 h0.3
J1: Mechanical 1 "1" at 203.089,144.836 h1.88 r270
WiFi: Top Overlay "2" at 114.808,57.15 h1.27 r90; Top Overlay "1" at 117.348,57.658 h1.27 r90; Top Overlay "7" at 117.348,68.834 h1.27 r90; Top Overlay "8" at 114.808,68.834 h1.27 r90